# Altium PCB PCA_0011_Mini Breakout_REV_B.PcbDoc
Units mm, origin at the board's own origin, x right, y up, seen from the top; angles counter-clockwise.
Board outline 24.13 x 31.73 mm, 2 copper layers (Top Layer, Bottom Layer), stack 1.671 mm thick; 2 components, 14 nets, 50 pads, 3 vias.
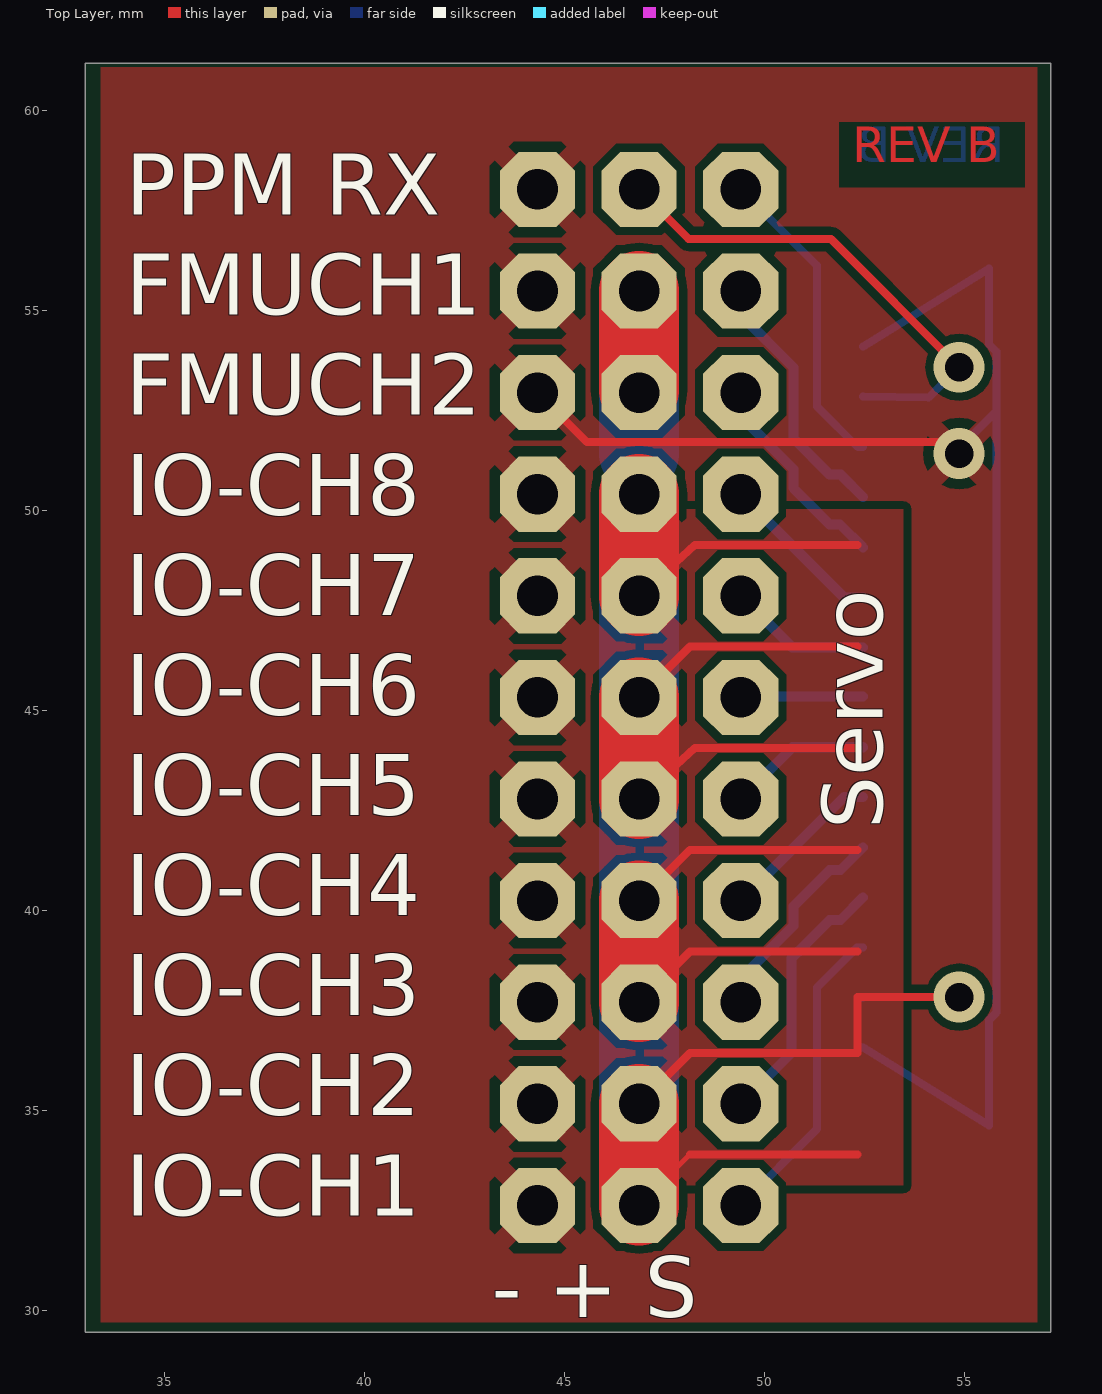
[diagram p0: Top Layer view]
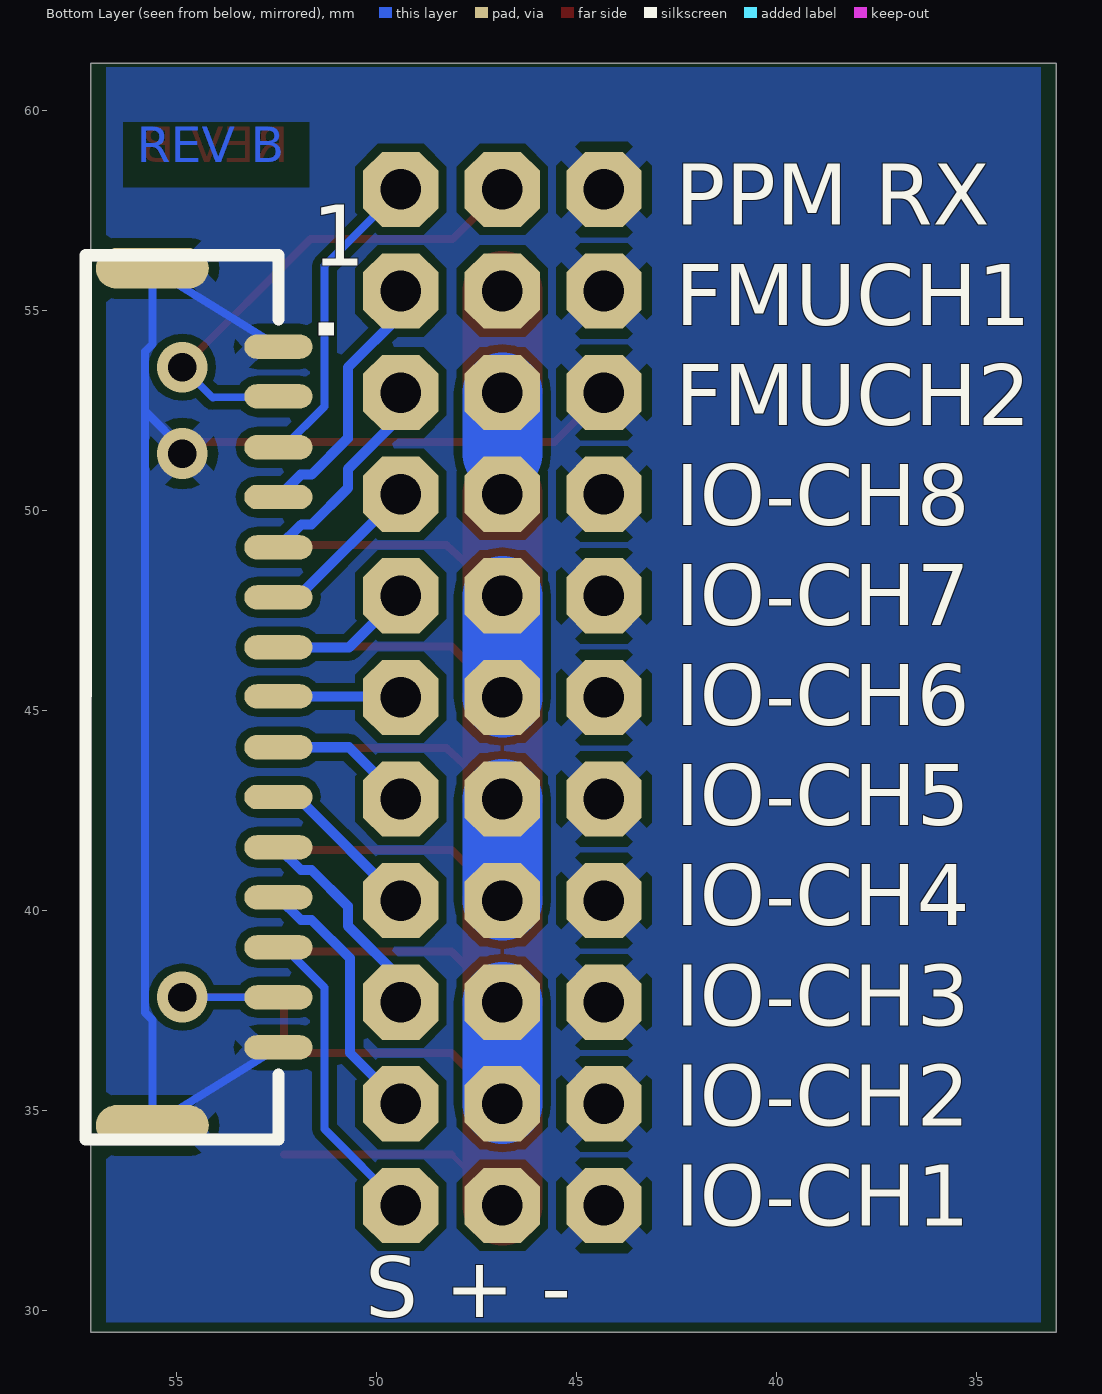
[diagram p1: Bottom Layer view, seen from below]

## Layer stack, top to bottom
Top Solder: solder mask 0.0102, Solder Resist, Dk 3.5
Top Layer: signal copper 0.0356
Dielectric 1: dielectric 1.6, FR-4, Dk 4.8
Bottom Layer: signal copper 0.0356
Bottom Solder: solder mask 0.0102, Solder Resist, Dk 3.5

## Board outline
33.02,29.464 33.02,61.19 57.15,61.19 57.15,29.464

## Design rules (kind name [scope] priority, off if disabled: settings)
Clearance [All] p1: gap=0.2
MinimumSolderMaskSliver [All] p1 off: minsoldermaskwidth=0.254
PolygonConnect [All] p1: connectstyle=Relief reliefconductorwidth=0.5 reliefentries=4 polygonreliefangle="45 Angle" airgapwidth=0.254
RoutingVias [All] p1: holewidth=0.711 width=1.27 viastyle="Through Hole" minholewidth=0.711 minwidth=1.27 maxholewidth=0.711 maxwidth=1.27
SilkToSilkClearance [All] p1 off: silktosilkclearance=0.254
SilkToSolderMaskClearance [IsPad] p1 off: minsilkscreentomaskgap=0.254 clearancetoexposedcopper=TRUE
SolderMaskExpansion [All] p1: expansion=0.102
UnpouredPolygon [All] p1: allowunpoured=FALSE
Width [All] p1: maxlimit=2 minlimit=0.127 preferedwidth=0.2
26 further rules are at their usual default settings.

## Components (designator, comment, footprint, x,y, rotation, side; value= is the part's Value field where it differs from the comment)
1 "CLICKMATE_1.25_15" CLICKMATE_H15 57.912,45.339 r90 bottom
Servo "3X11_RA" 3X11RA 46.863,49.149 r0 top

## Footprints (in the part's own frame and the unit in brackets; to place one, negate y for a bottom-side part, rotate by r counter-clockwise, add the part's x,y. Pads: shape width x height; smd on the part's side, far side on the other; paste and mask are expansions set on the pad)
3X11RA [mil]
  oct 74x74 hole 40: 1(100,-650) 2(0,-650) 3(-100,-650) 4(100,-550) 5(0,-550) 6(-100,-550) 7(100,-450) 8(0,-450) 9(-100,-450) 10(100,-350) 11(0,-350) 12(-100,-350) 13(100,-250) 14(0,-250) 15(-100,-250) 16(100,-150) 17(0,-150) 18(-100,-150) 19(100,-50) 20(0,-50) 21(-100,-50) 22(100,50) 23(0,50) 24(-100,50) 25(100,150) 26(0,150) 27(-100,150) 28(100,250) 29(0,250) 30(-100,250) 31(100,350) 32(0,350) 33(-100,350)
CLICKMATE_H15 [mil]
  rrect100% 24x67 smd: 1(345.24,-214.57) 2(296.24,-214.57) 3(246.24,-214.57) 4(197.24,-214.57) 5(147.64,-214.57) 6(98.42,-214.57) 7(49.21,-214.57) 8(0.97,-214.57) 9(-49.03,-214.57) 10(-98.03,-214.57) 11(-147.64,-214.57) 12(-196.85,-214.57) 13(-246.06,-214.57) 14(-295.27,-214.57) 15(-344.49,-214.57)
  rrect100% 40x111 smd: GND(-421.26,-90.55) GND(422.24,-90.55)
  silkscreen extent -435,-215 435,-25, body extent -436,-231 434,-35, height 217

## Part data
1: "Connector, Receptacle, 15Pos, 1.25MM, R/A, SMD, Tin"

## Via types
v1: diameter 1.27, hole 0.711, Top Layer to Bottom Layer, 3 vias

## Nets (pads, with @x,y where several pads share a name; then routed paths per layer and width w, separated by ;. In a path a pad name is that pad's centre, name@x,y a point inside that pad or via, vN(x,y) a via of type N, cw(c..) or ccw(c..) an arc to the next point about the centre after c; other vN are vias at no path point)
FMU-CH1-PROT: 1.4 Servo.28 | length 6.6
  Bottom Layer w0.254: Servo.28 49.403,54.908 50.724,53.587 50.724,51.816 51.632,50.908 51.903,50.908 1.4
FMU-CH2-PROT: 1.5 Servo.25 | length 5.3
  Bottom Layer w0.254: Servo.25 49.403,52.368 50.724,51.047 50.724,50.571 51.632,49.663 51.888,49.663 1.5
GND: 1.1 1.15 1.GND Servo.3 Servo.6 Servo.9 Servo.12 Servo.15 Servo.18 Servo.21 Servo.24 Servo.27 Servo.30 Servo.33 | length 41.6
  Top Layer w0.2: Servo.27 45.563,51.719 54.58,51.719 v1(54.864,51.435)
  Bottom Layer w0.2: 1.15 55.612,34.639 55.612,37.272 55.799,37.459 55.799,52.497 ; 1.1 55.612,56.064 55.612,54.168 55.799,53.981 55.799,52.497 ; v1@54.8,51.498 55.799,52.497
IO-CH1-PROT: 1.13 Servo.1 | length 7.8
  Bottom Layer w0.2: Servo.1 51.311,34.547 51.311,38.09 52.311,39.089 1.13
IO-CH2-PROT: 1.12 Servo.4 | length 6.6
  Bottom Layer w0.254: Servo.4 50.673,36.449 50.673,38.816 51.632,39.775 51.898,39.775 1.12
IO-CH3-PROT: 1.11 Servo.7 | length 5.3
  Bottom Layer w0.254: Servo.7 49.403,38.31 50.724,39.631 50.724,40.117 51.632,41.025 51.898,41.025 1.11
IO-CH4-PROT: 1.10 Servo.10 | length 4.1
  Bottom Layer w0.254: Servo.10 51.993,42.849 1.10
IO-CH5-PROT: 1.9 Servo.13 | length 3.6
  Bottom Layer w0.254: Servo.13 50.698,44.094 1.9
IO-CH6-PROT: 1.8 Servo.16 | length 3.1
  Bottom Layer w0.254: Servo.16 49.428,45.364 1.8
IO-CH7-PROT: 1.7 Servo.19 | length 3.6
  Bottom Layer w0.254: Servo.19 50.693,46.589 1.7
IO-CH8-PROT: 1.6 Servo.22 | length 4.1
  Bottom Layer w0.254: Servo.22 51.983,47.839 1.6
Net1_14: 1.14 Servo.2 Servo.5 Servo.8 Servo.11 Servo.14 Servo.17 Servo.20 Servo.23 Servo.26 Servo.29 | length 70
  Top Layer w0.127: Servo.2 48.133,33.909
  Top Layer w0.2: Servo.5 48.133,36.449 52.324,36.449 52.324,37.846 v1(54.864,37.846) ; Servo.8 48.133,38.989 52.324,38.989 ; Servo.11 48.133,41.529 52.324,41.529 ; Servo.14 48.26,44.069 52.324,44.069 ; Servo.17 48.133,46.609 52.324,46.609 ; Servo.20 48.26,49.149 52.324,49.149 ; 48.133,33.909 52.324,33.909
  Top Layer w2: Servo.2 Servo.5 ; Servo.8 Servo.11 ; Servo.14 Servo.17 ; Servo.20 Servo.23 ; Servo.26@46.863,53.019 Servo.29
  Bottom Layer w0.2: 1.14 v1(54.864,37.846)
  Bottom Layer w2: Servo.5 Servo.8 ; Servo.11 Servo.14 ; Servo.17 Servo.20 ; 46.863,51.435 Servo.26
PPM-SBUS-PROT: 1.3 Servo.31 | length 7.8
  Bottom Layer w0.2: Servo.31 51.311,56.131 51.311,52.613 52.331,51.594 1.3
RX_5V0_OUT: 1.2 Servo.32 | length 12.6
  Top Layer w0.2: Servo.32 48.103,56.799 51.659,56.799 v1(54.864,53.594)
  Bottom Layer w0.2: 1.2 54.102,52.832 v1(54.864,53.594)

## Polygon pours and split planes (outlines as drawn)
Net1_14 on Top Layer "VCC SERVO" (solid, remove dead copper, pour order 2): 46.99,50.038 53.467,50.038 53.467,33.147 46.99,33.147
GND on Top Layer "Top Layer-No Net" (solid, remove dead copper, pour order 4): 33.401,61.087 56.82,61.087 56.82,29.718 33.401,29.718
GND on Bottom Layer "Bott GND" (solid, remove dead copper, pour order 6): 33.401,61.087 56.769,61.087 56.769,29.718 33.401,29.718

## Other copper
Top Layer:
  text "REV B" at 52.197,58.42 h1.52
Bottom Layer:
  text "REV B" at 56.007,58.42 h1.52

## Silkscreen, mask and mechanical layers (free items; w line width, h text height)
Top Overlay:
  text "PPM RX" at 34.036,57.404 h1.52
  text "FMUCH1" at 34.036,54.902 h1.52
  text "FMUCH2" at 34.036,52.4 h1.52
  text "IO-CH8" at 34.036,49.898 h1.52
  text "IO-CH7" at 34.036,47.396 h1.52
  text "IO-CH6" at 34.036,44.895 h1.52
  text "IO-CH5" at 34.036,42.393 h1.52
  text "IO-CH4" at 34.036,39.891 h1.52
  text "IO-CH3" at 34.036,37.389 h1.52
  text "IO-CH2" at 34.036,34.887 h1.52
  text "IO-CH1" at 34.036,32.385 h1.52
  text "- + S" at 43.18,29.845 h1.52
Bottom Overlay:
  text "PPM RX" at 42.545,57.15 h1.52
  text "FMUCH1" at 42.545,54.648 h1.52
  text "FMUCH2" at 42.545,52.146 h1.52
  text "IO-CH8" at 42.545,49.644 h1.52
  text "IO-CH7" at 42.545,47.142 h1.52
  text "IO-CH6" at 42.545,44.64 h1.52
  text "IO-CH5" at 42.545,42.139 h1.52
  text "IO-CH4" at 42.545,39.637 h1.52
  text "IO-CH3" at 42.545,37.135 h1.52
  text "IO-CH2" at 42.545,34.633 h1.52
  text "IO-CH1" at 42.545,32.131 h1.52
  text "S + -" at 50.292,29.845 h1.52
Mechanical 1:
  the board outline again, w0.254
Mechanical 16:
  drawing of 162 lines, arcs and shapes, not listed
  text "Layer" at 61.976,57.404 h1.52
  text "Name" at 68.608,57.404 h1.52
  text "Material" at 81.194,57.404 h1.52
  text "Thickness" at 92.532,57.404 h1.52
  text "Constant" at 101.89,57.404 h1.52
  text "Board Layer Stack" at 110.57,57.404 h1.52
  text "1" at 61.976,54.356 h1.52
  text "Top Paste" at 68.608,54.356 h1.52
  text "2" at 61.976,51.308 h1.52
  text "Top Overlay" at 68.608,51.308 h1.52
  text "3" at 61.976,48.26 h1.52
  text "Top Solder" at 68.608,48.26 h1.52
  text "Solder Resist" at 81.194,48.26 h1.52
  text "0.010mm" at 92.532,48.26 h1.52
  text "3.5" at 101.89,48.26 h1.52
  text "4" at 61.976,45.212 h1.52
  text "Top Layer" at 68.608,45.212 h1.52
  text "Copper" at 81.194,45.212 h1.52
  text "0.036mm" at 92.532,45.212 h1.52
  text "5" at 61.976,42.164 h1.52
  text "Dielectric 1" at 68.608,42.164 h1.52
  text "FR-4" at 81.194,42.164 h1.52
  text "1.600mm" at 92.532,42.164 h1.52
  text "4.8" at 101.89,42.164 h1.52
  text "6" at 61.976,39.116 h1.52
  text "Bottom Layer" at 68.608,39.116 h1.52
  text "Copper" at 81.194,39.116 h1.52
  text "0.036mm" at 92.532,39.116 h1.52
  text "7" at 61.976,36.068 h1.52
  text "Bottom Solder" at 68.608,36.068 h1.52
  text "Solder Resist" at 81.194,36.068 h1.52
  text "0.010mm" at 92.532,36.068 h1.52
  text "3.5" at 101.89,36.068 h1.52
  text "8" at 61.976,33.02 h1.52
  text "Bottom Overlay" at 68.608,33.02 h1.52
  text "9" at 61.976,29.972 h1.52
  text "Bottom Paste" at 68.608,29.972 h1.52